# Altium PCB PCB1.PcbDoc
Units mil, origin at the board's own origin, x right, y up, seen from the top; angles counter-clockwise.
Board outline 1040 x 1480 mil, 2 copper layers (Top Layer, Bottom Layer); 33 components, 27 nets, 148 pads, 101 vias.
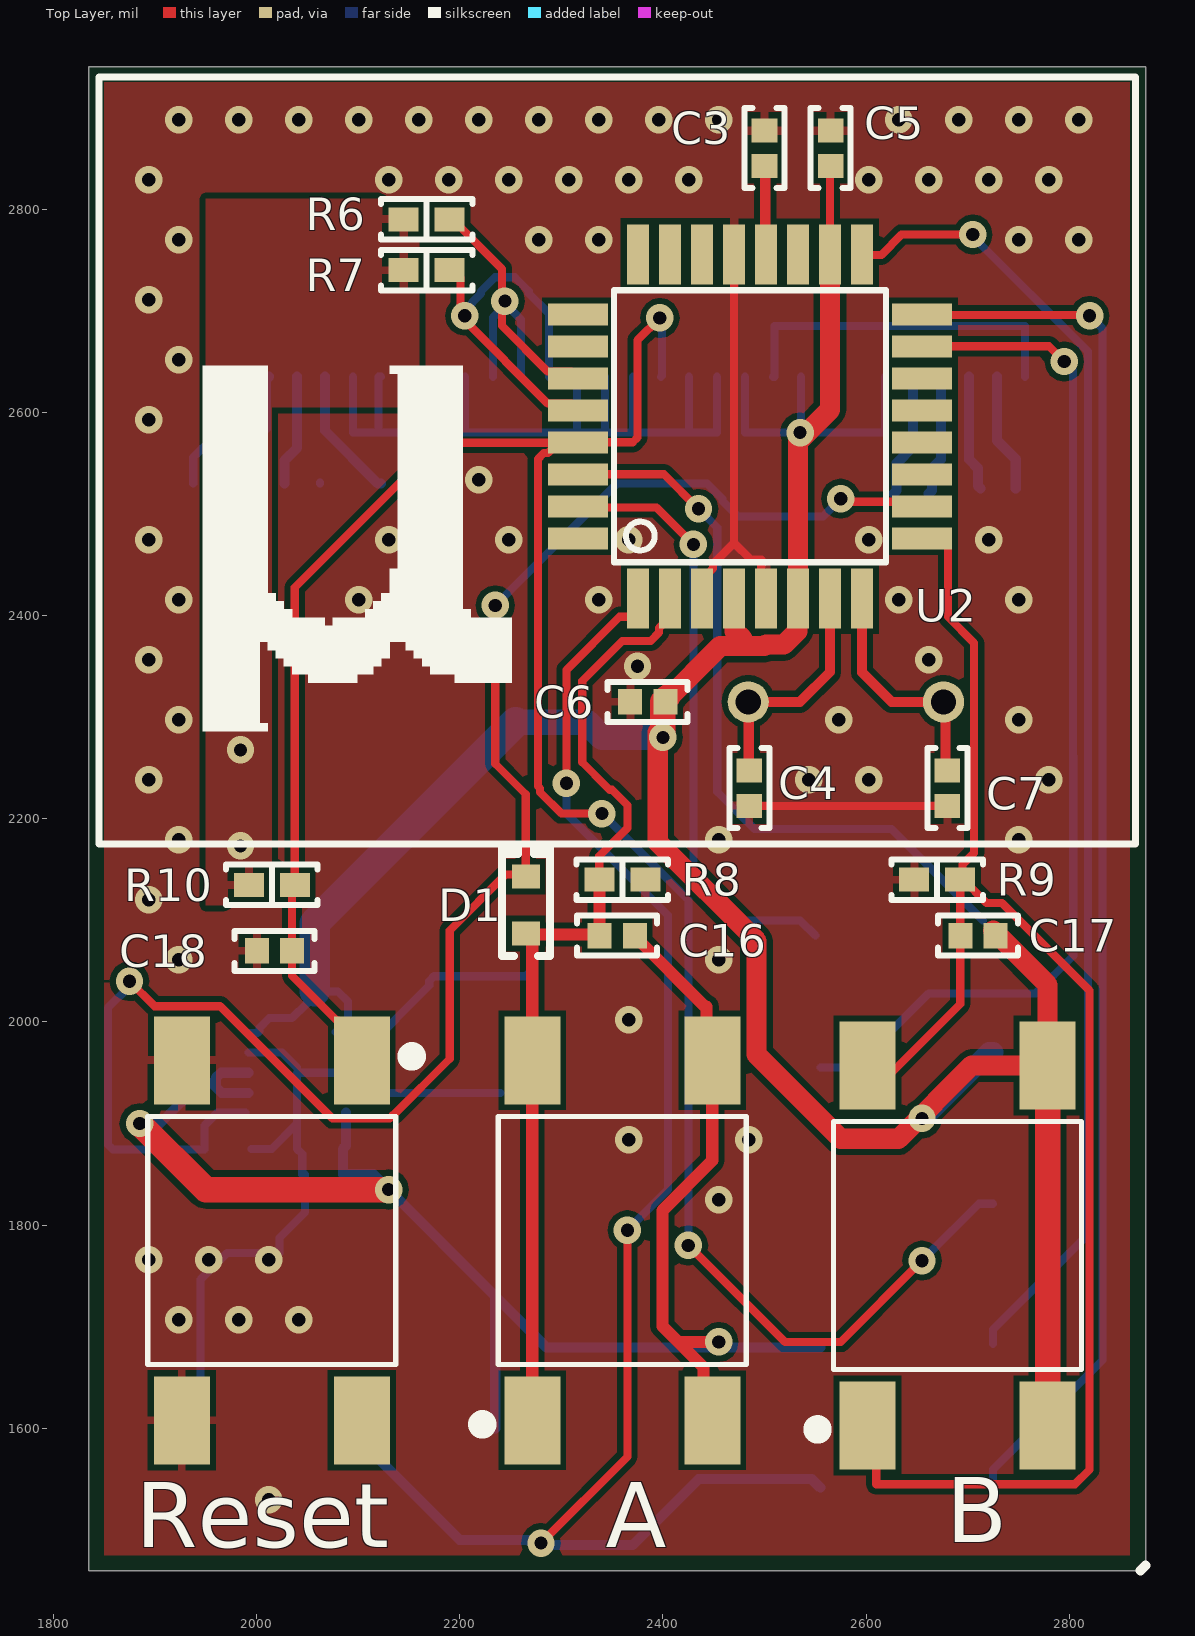
[diagram p0: Top Layer view]
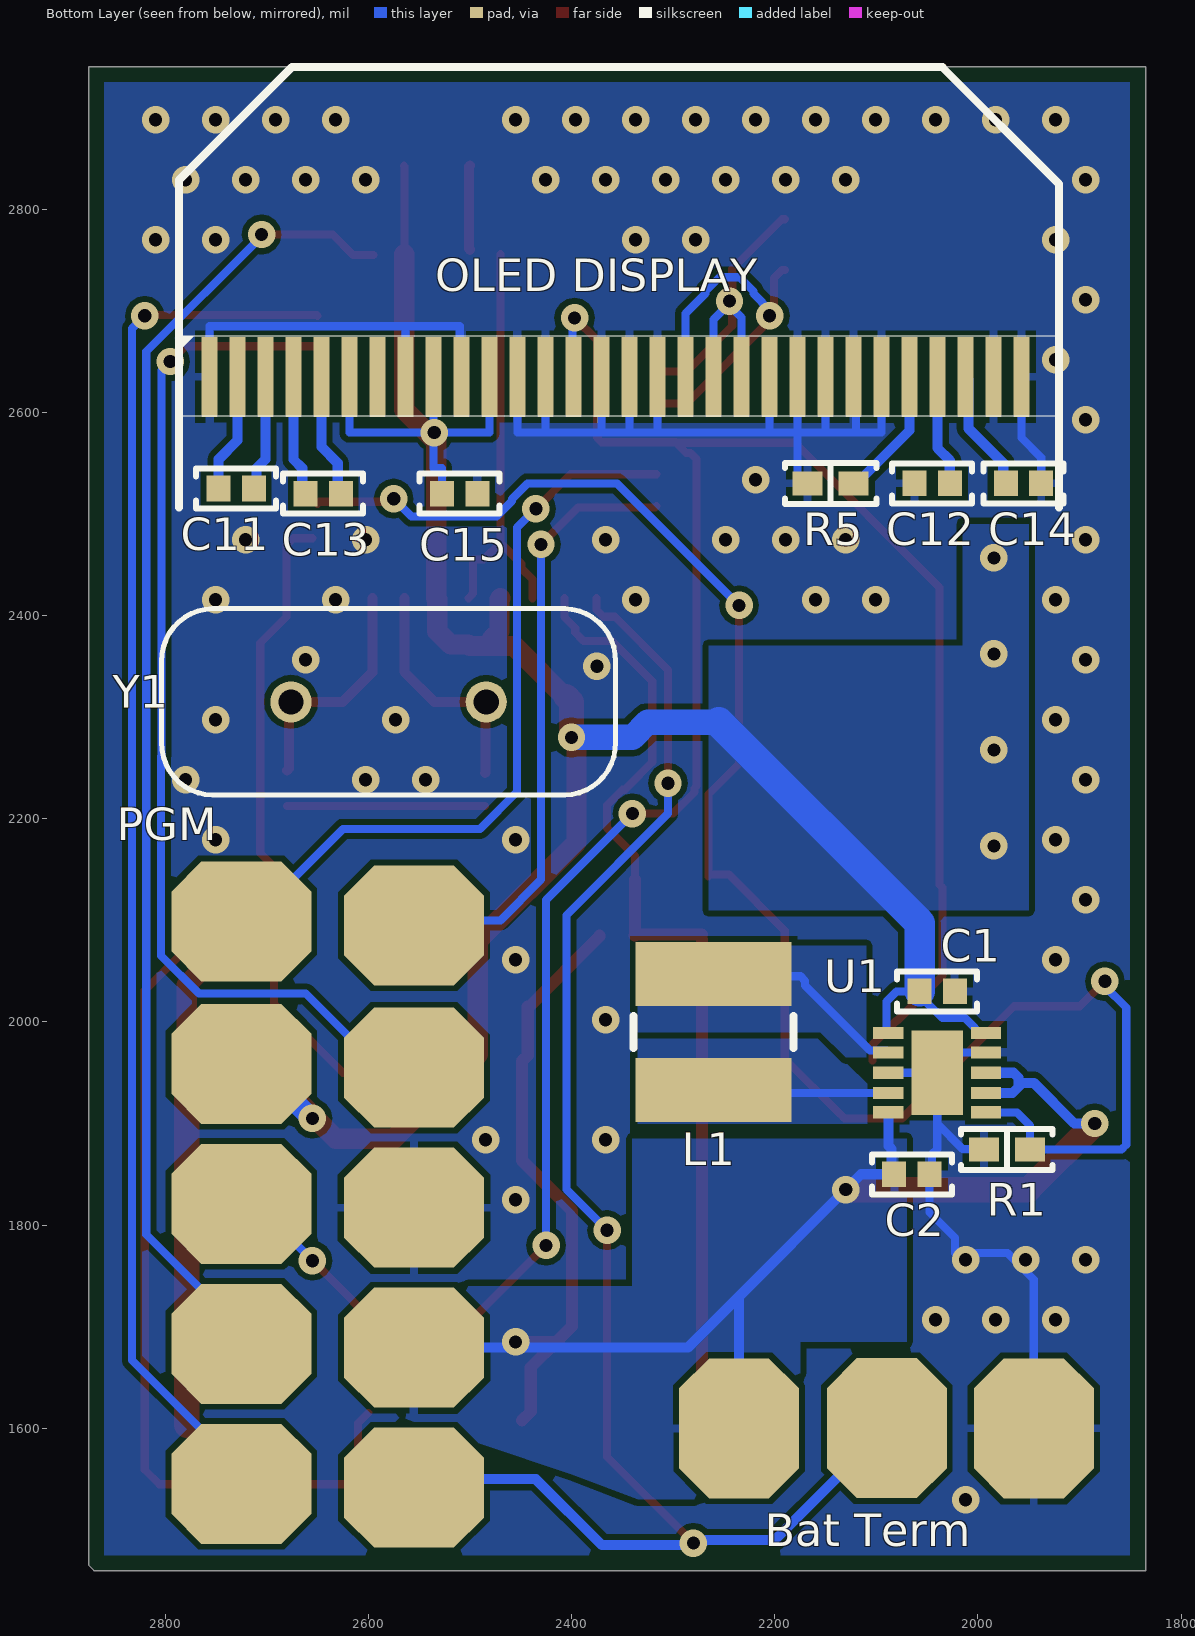
[diagram p1: Bottom Layer view, seen from below]

## Layer stack, top to bottom
Top Solder: solder mask 0.4, Solder Resist, Dk 3.5
Top Layer: signal copper 1.4
Dielectric 1: dielectric 12.6, FR-4, Dk 4.8
Bottom Layer: signal copper 1.4
Bottom Solder: solder mask 0.4, Solder Resist, Dk 3.5

## Board outline
1835,1460 2870,1460 2875,1465 2875,2940 1835,2940

## Design rules (kind name [scope] priority, off if disabled: settings)
BoardOutlineClearance [All] p1: gap=15 ignorepadtopadclearanceinfootprint=FALSE
Clearance [All] p1: gap=6 ignorepadtopadclearanceinfootprint=FALSE except(0: Arc-Hole Track-Hole SMDPad-Hole THPad-Hole Via-Hole Fill-Hole Poly-Hole Region-Hole Text-Hole)
ComponentClearance [All] p1: gap=1 collisioncheckmode=3 verticalgap=1 showdistances=FALSE
DiffPairsRouting [All] p1: maxlimit=393.7 minlimit=6 mostfreqgap=8 toplayer_minwidth=6 toplayer_maxwidth=15 toplayer_prefwidth=8 bottomlayer_minwidth=6 bottomlayer_maxwidth=15 bottomlayer_prefwidth=8 maxuncoupledlength=500
HoleSize [All] p1: absolutevalues=TRUE maxlimit=265 minlimit=13 maxpercent=80.000 minpercent=20.000
HoleToHoleClearance [All] p1: gap=10 allowstackedmicrovias=FALSE
MinimumAnnularRing [All] p1: minimumring=7
MinimumSolderMaskSliver [All] p1: minsoldermaskwidth=0
PlaneClearance [All] p1: clearance=10
PlaneConnect [All] p1: planeconnectstyle=Direct reliefexpansion=16 reliefentries=4 reliefconductorwidth=6 reliefairgap=6
PolygonConnect [All] p1: connectstyle=Relief reliefconductorwidth=8 reliefentries=4 polygonreliefangle="90 Angle" airgapwidth=6
RoutingCorners [All] p1: cornerstyle=45-Degree minsetback=49.21 maxsetback=49.21
RoutingVias [All] p1: holewidth=15 width=30 viastyle="Through Hole" minholewidth=13 minwidth=27 maxholewidth=100 maxwidth=114
SilkToSilkClearance [All] p1: silktosilkclearance=0
SilkToSolderMaskClearance [IsPad] p1: minsilkscreentomaskgap=6 clearancetoexposedcopper=TRUE
SolderMaskExpansion [All] p1: expansion=2.95 istentingtop=FALSE
Width [All] p1: maxlimit=400 minlimit=6 preferedwidth=8
20 further rules are at their usual default settings.

## Classes and differential pairs
component class Sheet2: C3 C4 C5 C6 C7 C11 C12 C13 C14 C15 "OLED DISPLAY" R5 R6 R7 U2 Y1
component class Sheet1: A B "Bat Term" C1 C2 C16 C17 C18 D1 L1 PGM R1 R8 R9 R10 Reset U1

## Components (designator, comment, footprint, x,y, rotation, side; value= is the part's Value field where it differs from the comment)
A "HP0315AFKP4-R" *SW_HP0315AFKP4-R 2360,1785 r90 top (schematic designator But0)
B "HP0315AFKP4-R" *SW_HP0315AFKP4-R 2690,1780 r90 top (schematic designator But1)
"Bat Term" "Batt_Conn" BattConn 2090,1600 r180 bottom (schematic designator Con2)
C1 "10µF" "CAP 0402_1005" 2040,2030 r0 bottom
C2 "10µF" "CAP 0402_1005" 2065,1850 r0 bottom
C3 "0.1µF" "CAP 0402_1005" 2500,2860 r90 top
C4 "22pF" "CAP 0402_1005" 2485,2230 r270 top
C5 "1µF" "CAP 0402_1005" 2565,2860 r270 top
C6 "0.1µF" "CAP 0402_1005" 2385,2315 r180 top
C7 "22pF" "CAP 0402_1005" 2680,2230 r270 top
C11 "1µF" "CAP 0402_1005" 2730,2525 r180 bottom
C12 "4.7µF" "CAP 0402_1005" 2045,2530 r180 bottom
C13 "1µF" "CAP 0402_1005" 2644.35,2520 r0 bottom
C14 "2.2µF" "CAP 0402_1005" 1955,2530 r0 bottom
C15 "10µF" "CAP 0402_1005" 2510,2520 r0 bottom
C16 "10µF" "CAP 0402_1005" 2355,2085 r180 top
C17 "10µF" "CAP 0402_1005" 2710,2085 r180 top
C18 "10µF" "CAP 0402_1005" 2017.68,2070 r0 top
D1 "RB510SM-40T2R" SOD-523 2265,2115 r90 top
L1 "1.5uH" "TDK VLCF4028-2" 2260,1990 r90 bottom value=56µH
"OLED DISPLAY" "SSD1306" PCBComponent_1 2364.22,2631.1 r180 bottom (schematic designator U4)
PGM "Ext_Conn" JtagConn 2639.4,1751.39 r90 bottom (schematic designator Con1)
R1 "10 kOhms" "RES 0402_1005" 1971.47,1874.37 r180 bottom
R5 "910 kOhms" "RES 0402_1005" 2145,2530 r0 bottom
R6 "10 kOhms" "RES 0402_1005" 2167.36,2790 r0 top
R7 "10 kOhms" "RES 0402_1005" 2167.36,2740 r0 top
R8 "10 kOhms" "RES 0402_1005" 2360,2140 r180 top
R9 "10 kOhms" "RES 0402_1005" 2670,2140 r180 top
R10 "10 kOhms" "RES 0402_1005" 2015,2135 r180 top
Reset "HP0315AFKP4-R" *SW_HP0315AFKP4-R 2015,1785 r270 top
U1 "TPS63030DSKT" *SON50P260X260X80-11N 2040,1950 r180 bottom
U2 "ATMEGA328P-AU" QFP80P900X900X120-32N 2485.71,2586.26 r90 top (schematic designator U)
Y1 "8-16MHz" XTAL_ECS-80-18-4XDN 2580,2315 r180 bottom

## Footprints (in the part's own frame and the unit in brackets; to place one, negate y for a bottom-side part, rotate by r counter-clockwise, add the part's x,y. Pads: shape width x height; smd on the part's side, far side on the other; paste and mask are expansions set on the pad)
*SON50P260X260X80-11N [mil]
  rect 30x12 smd mask+1: 1(-48,39) 3(-48,0) 4(-48,-20) 5(-48,-39) 6(48,-39) 7(48,-20) 8(48,0) 9(48,20) 10(48,39)
  rect 30x12 smd paste+0 mask+1: 2(-48,20)
  rect 51x83 smd mask+1: 11(0,0)
*SW_HP0315AFKP4-R [mm]
  rect 2.2x1.4 smd: 1(-4.5,2.25) 2(4.5,2.25) 3(-4.5,-2.25) 4(4.5,-2.25)
  silkscreen extent -4.65,-3.1 3.1,3.55
BattConn [mm]
  oct 3x3.5 smd: 1(-3.683,0) 2(0.008,0.002) 3(3.683,0)
"CAP 0402_1005" [mm] "Chip Capacitor, 2-Leads, Body 1.02x0.51mm, IPC Medium Density"
  rect 0.6x0.64 smd: 1(-0.44,0) 2(0.44,0)
  silkscreen extent -1,-0.5 1,0.5, body extent -0.5,-0.26 0.5,0.26, height 0.52
JtagConn [mm]
  oct 3x3.5 smd: 1(-5.328,-2.144) 2(-1.828,-2.144) 3(1.672,-2.144) 4(5.172,-2.144) 5(-5.231,2.174) 6(-1.731,2.174) 7(1.769,2.174) 8(5.269,2.174) 9(8.728,-2.144) 10(8.825,2.174)
PCBComponent_1 [mm]
  rect 0.4x2 smd: 1(-9.959,0.099) 2(-9.259,0.099) 3(-8.559,0.099) 4(-7.859,0.099) 5(-7.159,0.099) 6(-6.459,0.099) 7(-5.759,0.099) 8(-5.059,0.099) 9(-4.359,0.099) 10(-3.659,0.099) 11(-2.959,0.099) 12(-2.259,0.099) 13(-1.559,0.099) 14(-0.859,0.099) 15(-0.159,0.099) 16(0.541,0.099) 17(1.241,0.099) 18(1.941,0.099) 19(2.641,0.099) 20(3.341,0.099) 21(4.041,0.099) 22(4.741,0.099) 23(5.441,0.099) 24(6.141,0.099) 25(6.841,0.099) 26(7.541,0.099) 27(8.241,0.099) 28(8.941,0.099) 29(9.641,0.099) 30(10.341,0.099)
  silkscreen extent -10.8,-0.89 11.21,1.11
QFP80P900X900X120-32N [mm]
  rect 1.5x0.55 smd: 1(-4.3,2.8) 2(-4.3,2) 3(-4.3,1.2) 4(-4.3,0.4) 5(-4.3,-0.4) 6(-4.3,-1.2) 7(-4.3,-2) 8(-4.3,-2.8) 17(4.3,-2.8) 18(4.3,-2) 19(4.3,-1.2) 20(4.3,-0.4) 21(4.3,0.4) 22(4.3,1.2) 23(4.3,2) 24(4.3,2.8)
  rect 0.55x1.5 smd: 9(-2.8,-4.3) 10(-2,-4.3) 11(-1.2,-4.3) 12(-0.4,-4.3) 13(0.4,-4.3) 14(1.2,-4.3) 15(2,-4.3) 16(2.8,-4.3) 25(2.8,4.3) 26(2,4.3) 27(1.2,4.3) 28(0.4,4.3) 29(-0.4,4.3) 30(-1.2,4.3) 31(-2,4.3) 32(-2.8,4.3)
  silkscreen extent -3.4,-3.4 3.4,3.4, body extent -4.63,-4.5 4.37,4.5, height 1.16
"RES 0402_1005" [mm] "Chip Resistor, 2-Leads, Body 1.0x0.5mm, IPC Medium Density"
  rect 0.75x0.6 smd: 1(-0.575,0) 2(0.575,0)
  silkscreen extent -1.14,-0.51 1.14,0.51, body extent -0.5,-0.25 0.5,0.25, height 0.35
SOD-523 [mm] "Molded Diode, 2-Leads, Body 1.60x0.80mm, IPC Medium Density"
  rect 0.6x0.7 smd: 1(-0.71,0) 2(0.71,0)
  silkscreen extent -1.27,-0.6 1.47,0.6, body extent -0.8,-0.4 0.8,0.4, height 0.82
"TDK VLCF4028-2" [mm] "Precision Wire Wound Inductor, 2-Leads, Body 4.00x4.00mm, IPC Medium Density"
  rect 1.6x3.9 smd: 1(-1.45,0) 2(1.45,0)
  silkscreen extent -0.4,-2 0.4,2, body extent -2.05,-2 2.05,2, height 2.81
XTAL_ECS-80-18-4XDN [mm]
  round 1.03 hole 0.63: 1(-2.44,0) 2(2.44,0)
  silkscreen extent -5.68,-2.33 5.68,2.33, body extent -5.67,-2.32 5.68,2.33, height 3.7

## Part data
A B Reset: "Tactile Switch SPST-NO Top Actuated Surface Mount", Package=None, Availability=Unavailable, MF="NKK Switches", MP=HP0315AFKP4-R, Price=None, SnapEDA_Link=https://www.snapeda.com/parts/HP0315AFKP4-R/NKK%20Switches/view-part/379626/?ref=snap
C1 C2 C15 C16 C17 C18: library part CL05A106MP8NUB8, "CAP CER 10UF 10V X5R 0402", Device Package="0402 (1005 Metric)", Manufacturer="Samsung Electro-Mechanics", Operating Temperature="-55°C ~ 85°C", Supplier Part Number 1=1276-6830-1-ND, Temperature Coefficient=X5R, Tolerance=±20%, Voltage - Rated=10V, Applications="General Purpose", Capacitance=10µF, ComponentLink1Description=Datasheet, ComponentLink1URL=http://www.samsungsem.com/kr/support/product-search/mlcc/CL05A106MP8NUB8.jsp, ComponentLink2Description="DigiKey Link", ComponentLink2URL=http://digikey.com/product-detail/en/samsung-electro-mechanics/CL05A106MP8NUB8/1276-6830-1-ND/5961689, LastUpdated="19.01.2020 16:07:13", Lifecycle Status=Active, Minimum Order=1, Mounting Type="Surface Mount, MLCC", Package / Case="0402 (1005 Metric)", Packaging=TapeAndReel, Part Number=CL05A106MP8NUB8, Part Status=Active, PartId=1758, Price=0.08, Series=CL, Size / Dimension="0.039\" L x 0.020\" W (1.00mm x 0.50mm)", Supplier 1=DigiKey, Thickness (Max)="0.035\" (0.90mm)"
C3 C4 C5 C6 C7 C11 C12 C13 C14: library part CL05A106MP8NUB8, "CAP CER 10UF 10V X5R 0402", Capacitance=10µF, Device Package="0402 (1005 Metric)", Manufacturer="Samsung Electro-Mechanics", Operating Temperature="-55°C ~ 85°C", Supplier Part Number 1=1276-6830-1-ND, Temperature Coefficient=X5R, Tolerance=±20%, Voltage - Rated=10V, Applications="General Purpose", ComponentLink1Description=Datasheet, ComponentLink1URL=http://www.samsungsem.com/kr/support/product-search/mlcc/CL05A106MP8NUB8.jsp, ComponentLink2Description="DigiKey Link", ComponentLink2URL=http://digikey.com/product-detail/en/samsung-electro-mechanics/CL05A106MP8NUB8/1276-6830-1-ND/5961689, LastUpdated="19.01.2020 16:07:13", Lifecycle Status=Active, Minimum Order=1, Mounting Type="Surface Mount, MLCC", Package / Case="0402 (1005 Metric)", Packaging=TapeAndReel, Part Number=CL05A106MP8NUB8, Part Status=Active, PartId=1758, Price=0.08, Series=CL, Size / Dimension="0.039\" L x 0.020\" W (1.00mm x 0.50mm)", Supplier 1=DigiKey, Thickness (Max)="0.035\" (0.90mm)"
D1: "RB510SM-40 IS LOW VF", Current - Average Rectified (Io)=100mA, Current - Reverse Leakage @ Vr="2µA @ 40V", Device Package="SC-79, SOD-523", Manufacturer="Rohm Semiconductor", Operating Temperature - Junction="150°C (Max)", Supplier Device Package=EMD2, Supplier Part Number 1=846-RB510SM-40T2RCT-ND, Voltage - DC Reverse (Vr) (Max)=40V, Voltage - Forward (Vf) (Max) @ If="480mV @ 10mA", ComponentLink1Description=Datasheet, ComponentLink1URL=https://www.rohm.com/datasheet/RB510SM-40/rb510sm-40t2r-e, ComponentLink2Description="DigiKey Link", ComponentLink2URL=http://digikey.com/product-detail/en/rohm-semiconductor/RB510SM-40T2R/846-RB510SM-40T2RCT-ND/10670875, Diode Type=Schottky, LastUpdated="19.01.2020 16:25:52", Lifecycle Status=Active, Minimum Order=1, Mounting Type="Surface Mount", Package / Case="SC-79, SOD-523", Packaging=Unknown, Part Number=RB510SM-40T2R, Part Status=Active, PartId=2868, Price=0.03, Series=-, Speed="Small Signal =< 200mA (Io), Any Speed", Supplier 1=DigiKey
L1: library part VLCF5028T-560MR43-2, "FIXED IND 56UH 430MA 410 MOHM", Current - Saturation=430mA, DC Resistance (DCR)="410mOhm Max", Device Package=Nonstandard, Manufacturer="TDK Corporation", Operating Temperature="-40°C ~ 105°C", Supplier Part Number 1=445-6567-1-ND, Tolerance=±20%, Inductance=56µH, Inductance Frequency - Test=100kHz, ComponentLink1Description=Datasheet, ComponentLink1URL=https://product.tdk.com/info/en/catalog/datasheets/inductor_commercial_power_vlcf5028-2_en.pdf?ref_disty=digikey, ComponentLink2Description="DigiKey Link", ComponentLink2URL=http://digikey.com/product-detail/en/tdk-corporation/VLCF5028T-560MR43-2/445-6567-1-ND/2465874, Current Rating (Amps)=430mA, Height - Seated (Max)="0.110\" (2.80mm)", LastUpdated="19.01.2020 16:24:51", Lifecycle Status=Active, Material - Core=Ferrite, Minimum Order=1, Mounting Type="Surface Mount", Package / Case=Nonstandard, Packaging=TapeAndReel, Part Number=VLCF5028T-560MR43-2, Part Status=Active, PartId=193, Price=0.63, Series=VLCF, Shielding=Shielded, Size / Dimension="0.197\" L x 0.197\" W (5.00mm x 5.00mm)", Supplier 1=DigiKey, Type=Wirewound
R1 R6 R7 R8 R9 R10: library part RP73PF1E10KBTD, "RES 10K OHM 0.1% 1/10W 0402", Device Package="0402 (1005 Metric)", Manufacturer="TE Connectivity Passive Product", Operating Temperature="-55°C ~ 155°C", Power (Watts)="0.1W, 1/10W", Supplier Device Package=0402, Supplier Part Number 1=A127415CT-ND, Temperature Coefficient=±25ppm/°C, Tolerance=±0.1%, ComponentLink1Description=Datasheet, ComponentLink1URL=https://www.te.com/commerce/DocumentDelivery/DDEController?Action=srchrtrv&DocNm=1773272&DocType=DS&DocLang=English, ComponentLink2Description="DigiKey Link", ComponentLink2URL=http://digikey.com/product-detail/en/te-connectivity-passive-product/RP73PF1E10KBTD/A127415CT-ND/8261381, Composition="Thin Film", Height - Seated (Max)="0.014\" (0.35mm)", LastUpdated="19.01.2020 16:11:48", Lifecycle Status=Active, Minimum Order=1, Number of Terminations=2, Package / Case="0402 (1005 Metric)", Packaging=TapeAndReel, Part Number=RP73PF1E10KBTD, Part Status=Active, PartId=2434, Price=0.08, Resistance="10 kOhms", Series="RP73P, Holsworthy", Size / Dimension="0.039\" L x 0.020\" W (1.00mm x 0.50mm)", Supplier 1=DigiKey
R5: library part RP73PF1E10KBTD, "RES 10K OHM 0.1% 1/10W 0402", Device Package="0402 (1005 Metric)", Manufacturer="TE Connectivity Passive Product", Operating Temperature="-55°C ~ 155°C", Power (Watts)="0.1W, 1/10W", Resistance="10 kOhms", Supplier Device Package=0402, Supplier Part Number 1=A127415CT-ND, Temperature Coefficient=±25ppm/°C, Tolerance=±0.1%, ComponentLink1Description=Datasheet, ComponentLink1URL=https://www.te.com/commerce/DocumentDelivery/DDEController?Action=srchrtrv&DocNm=1773272&DocType=DS&DocLang=English, ComponentLink2Description="DigiKey Link", ComponentLink2URL=http://digikey.com/product-detail/en/te-connectivity-passive-product/RP73PF1E10KBTD/A127415CT-ND/8261381, Composition="Thin Film", Height - Seated (Max)="0.014\" (0.35mm)", LastUpdated="19.01.2020 16:11:48", Lifecycle Status=Active, Minimum Order=1, Number of Terminations=2, Package / Case="0402 (1005 Metric)", Packaging=TapeAndReel, Part Number=RP73PF1E10KBTD, Part Status=Active, PartId=2434, Price=0.08, Series="RP73P, Holsworthy", Size / Dimension="0.039\" L x 0.020\" W (1.00mm x 0.50mm)", Supplier 1=DigiKey
U1: "Buck-Boost Switching Regulator IC Positive Adjustable 1.2V 1 Output 900mA _Switch_ 10-WFDFN Exposed Pad", Package="SON-10 Texas Instruments", Availability=Unavailable, MF="Texas Instruments", MP=TPS63030DSKT, Price=None, SnapEDA_Link=https://www.snapeda.com/parts/TPS63030DSKT/Texas%20Instruments/view-part/449700/?ref=snap
U2: "AVR AVRÂ® ATmega Microcontroller IC 8-Bit 20MHz 32KB _16K x 16_ FLASH 32-TQFP _7x7_", Package="TQFP-32 Microchip Technology", Availability=Unavailable, MF="Microchip Technology", MP=ATMEGA328P-AU, Price=None, SnapEDA_Link=https://www.snapeda.com/parts/ATMEGA328P-AU/Microchip/view-part/4593405/?ref=snap
Y1: library part ECS-80-18-4XDN, "8MHz Â±30ppm Crystal 18pF 80 Ohms HC-49/US", Package="HC-49/US ECS International", Digi-Key_Part_Number=X1115-ND, Digi-Key_Purchase_URL=https://www.digikey.in/product-detail/en/ecs-inc/ECS-80-18-4XDN/X1115-ND/827606?utm_source=snapeda&utm_medium=aggregator&utm_campaign=symbol, MF="ECS Inc.", MP=ECS-80-18-4XDN, SnapEDA_Link=https://www.snapeda.com/parts/ECS-80-18-4XDN/ECS%20Inc./view-part/49558/?ref=snap

## Via types
v1: diameter 27, hole 13, Top Layer to Bottom Layer, tented both sides, 101 vias

## Nets (pads, with @x,y where several pads share a name; then routed paths per layer and width w, separated by ;. In a path a pad name is that pad's centre, name@x,y a point inside that pad or via, vN(x,y) a via of type N, cw(c..) or ccw(c..) an arc to the next point about the centre after c; other vN are vias at no path point)
3.3V: "OLED DISPLAY.6" "OLED DISPLAY.9" "OLED DISPLAY.11" B.3 B.4 C1.2 C5.2 C6.1 C15.2 C17.1 PGM.8 R6.1 R7.1 R10.2 U1.1 U1.10 U2.4 U2.6 U2.18 | length 3075.7
  Top Layer w8: 2465,2370 2472.44,2377.44 2478,2377.44 ; U2.18@2564.45,2760.55 2564.45,2842.13 C5.2
  Top Layer w20: v1@2395,2285 2395,2176.84 2492.14,2079.7 2492.14,1967.86 2575,1885 2631.93,1885 2704.09,1957.17 B.4 2778.58,2036.42 C17.1@2725,2090 ; C6.1 2402.32,2315.79 2456.53,2370 2465,2370 2500.02,2370 2501.46,2371.44 2518.91,2371.44 2532.13,2384.66 2532.13,2416.14 U2.6 2532.95,2570.93 2564.45,2602.42 U2.18 ; U2.4 2470.79,2416.14 2470.79,2384.66 2478,2377.44
  Top Layer w25: v1(2400,2280) 2400,2315 C6.1@2405,2320 ; B.3 B.4
  Bottom Layer w8: U1.10 2001,1989 2003,1991 2003,1994.14 2012.56,2003.7 2034.93,2003.7 2049.51,2018.28 2049.51,2021.4 2057.32,2029.21 C1.2 2080,2030 2090,2020 2090,1990 U1.1@2078,1990 ; 2480.71,2635 2480.71,2580 v1@2535.83,2580 ; C15.2 2527.32,2545 2535.83,2545 v1@2535.83,2580 ; 2535.83,2635 v1@2535.83,2580 ; 2618.5,2635 2618.5,2580 v1@2535.83,2580
  Bottom Layer w20: v1(2655,1905) 2656.08,1905 2721.08,1970 PGM.8@2725,1970
  Bottom Layer w25: 2255,2295 2325,2295 2340,2280 v1(2400,2280)
  Bottom Layer w30: C1.2 2057.32,2097.32 2255,2295
  other v1: 1984.25,2173.23 1984.25,2267.72 1984.25,2362.2 1984.25,2456.69 2535,2580
Button0: A.1 A.2 C16.2 D1.1 R8.2 U2.2 | length 950.3
  Top Layer w8: R8.2@2337.36,2145 2337.36,2163.26 2365,2190.9 2365,2213.23 2349.73,2228.5 2347.61,2228.5 2343.78,2232.33 2320.56,2255.56 2320.56,2335.56 2360,2375 2388,2375 2396.3,2383.3 2396.3,2387.6 2406.97,2398.27 U2.2
  Top Layer w12: A.1 A.2 D1.1@2271.42,2081.24 ; D1.1@2271.42,2086.02 2336.65,2086.02 C16.2@2337.52,2085.16 ; R8.2 2337.52,2139.84 C16.2@2337.52,2085.16 ; C16.2 C16.2@2337.52,2085.16
Button1: B.1 B.2 C17.2 R9.1 U2.9 | length 1521.4
  Top Layer w8: B.1@2600,1615 2610,1605 2610,1545 2805.76,1545 2820,1559.24 2820,2030.87 2733.91,2116.96 2718.63,2116.96 2695.59,2140 R9.1 2692.68,2139.96 C17.2 2692.68,2017.68 B.2@2625,1950 ; U2.9 2673.7,2476.02 2680.53,2469.2 2680.53,2398.73 2706.34,2372.92 2706.34,2166.34 2695,2155 2695,2147.81 R9.1@2692.19,2145
GND: "Bat Term.3" "OLED DISPLAY.1" "OLED DISPLAY.8" "OLED DISPLAY.10" "OLED DISPLAY.12" "OLED DISPLAY.13" "OLED DISPLAY.15" "OLED DISPLAY.16" "OLED DISPLAY.17" "OLED DISPLAY.21" "OLED DISPLAY.22" "OLED DISPLAY.23" "OLED DISPLAY.24" "OLED DISPLAY.25" "OLED DISPLAY.29" "OLED DISPLAY.30" C1.1 C2.1 C3.2 C4.2 C5.1 C6.2 C7.2 C12.1 C14.1 C15.1 C18.1 PGM.3 R1.1 R5.2 R8.1 R9.2 Reset.3 Reset.4 U1.3 U1.9 U1.11 U2.3 U2.5 U2.21 | length 2680.8
  Top Layer w8: U2.3 2438.46,2435.67 2449.13,2446.34 2449.13,2450.64 2469.96,2471.46 ; U2.21 2469.96,2471.46 ; C4.2 C7.2 ; U2.5 2496.77,2421.65 2496.77,2455 2486.42,2455 2469.96,2471.46
  Bottom Layer w8: C14.1 1937.68,2555.5 1957.09,2574.91 1957.09,2635 ; 1945,1600 1945,1746.53 1970.87,1772.4 2022.6,1772.4 2022.6,1787.6 2047.68,1812.68 C2.1 ; U1.9 2025,1970 U1.11@2040,1955 ; R1.1@1995,1875 2015,1875 2040,1900 ; C2.1@2045,1850 2045,1870 2040,1875 2040,1900 ; C12.1 C12.1@2062.32,2530.79 ; U1.3 U1.11 2040,1900 ; 2095,2634.88 2094.88,2635 2094.88,2580 2120,2580 ; 2122.44,2635 2120,2635 2120,2580 ; 2150,2635 2150,2580 ; R5.2 2169.75,2530 2177.56,2537.81 2177.56,2580 ; 2177.56,2635 2177.56,2580 ; 2205.12,2635 2205.12,2580 ; 2315.35,2635 2315.35,2580 ; 2342.91,2635 2342.91,2580 ; 2370.47,2635 2370.47,2580 ; 2425.59,2635 2425.59,2580 ; 2453.15,2635 2453.15,2580 2425.59,2580 ; 2508.27,2635 2510,2635 2510,2685 2563.39,2685 ; 2563.39,2635 2563.39,2685 ; 2756.3,2635 2756.3,2685 2563.39,2685 ; 2120,2580 2150,2580 ; 2150,2580 2177.56,2580 ; 2177.56,2580 2205.12,2580 ; 2205.12,2580 2315.35,2580 ; 2315.35,2580 2342.91,2580 ; 2342.91,2580 2370.47,2580 ; 2370.47,2580 2425.59,2580
  other v1: 2012.09,1529.72 1923.5,1706.89 1982.56,1706.89 2041.61,1706.89 1893.98,1765.94 1953.03,1765.94 2012.09,1765.94 2455,1825 2366.42,1884.06 2484.53,1884.06 2366.42,2002.17 1923.5,2061.22 2455,2061.22 1893.98,2120.28 1923.5,2179.33 2455,2179.33 2750.28,2179.33 1893.98,2238.39 2543.58,2238.39 2602.64,2238.39 2779.8,2238.39 1923.5,2297.44 2573.11,2297.44 2750.28,2297.44 2375,2350 1893.98,2356.5 2661.69,2356.5 1923.5,2415.55 2100.67,2415.55 2159.72,2415.55 2336.89,2415.55 2632.17,2415.55 2750.28,2415.55 1893.98,2474.61 2130.2,2474.61 2189.25,2474.61 2248.31,2474.61 2366.42,2474.61 2602.64,2474.61 2720.75,2474.61 2218.78,2533.66 1893.98,2592.72 1923.5,2651.77 1893.98,2710.83 1923.5,2769.88 2277.83,2769.88 2336.89,2769.88 2750.28,2769.88 2809.33,2769.88 1893.98,2828.94 2130.2,2828.94 2189.25,2828.94 2248.31,2828.94 2307.36,2828.94 2366.42,2828.94 2425.47,2828.94 2602.64,2828.94 2661.69,2828.94 2720.75,2828.94 2779.8,2828.94 1923.5,2887.99 1982.56,2887.99 2041.61,2887.99 2100.67,2887.99 2159.72,2887.99 2218.78,2887.99 2277.83,2887.99 2336.89,2887.99 2395.94,2887.99 2455,2887.99 2632.17,2887.99 2691.22,2887.99 2750.28,2887.99 2809.33,2887.99
HDQ: "Bat Term.2" PGM.1 U2.1 | length 1602
  Top Layer w8: v1(2280,1487) 2365,1572 v1(2365,1795) ; v1(2305,2235) 2305,2346.5 2357.33,2398.83 2368.65,2398.83 2375.47,2405.65 U2.1
  Bottom Layer w8: v1(2305,2235) 2305,2205 2405,2105 2405,1835 v1(2365,1795)
  Bottom Layer w10: 2090,1600 2200,1490 2267.14,1490 2267.46,1489.68 2277.32,1489.68 2282,1485 2370,1485 2435,1550 2546.61,1550 PGM.1
MISO: PGM.5 U2.16 | length 1369.9
  Top Layer w8: U2.16@2650,2695 2650.75,2695.75 2819.25,2695.75 v1(2820,2695)
  Bottom Layer w8: PGM.5 2725,1559.46 2832.5,1666.96 2832.5,2682.5 v1(2820,2695)
MOSI: PGM.4 U2.15 | length 1034.6
  Top Layer w8: U2.15 2780,2665 v1(2795,2650)
  Bottom Layer w8: PGM.4 2588.71,1955 2661.59,2027.87 2766.62,2027.87 2803.9,2065.15 2803.9,2261.1 2803.57,2261.43 2803.57,2641.43 v1(2795,2650) 2795,2655 v1@2794.79,2655.21
NetC3_1: C3.1 U2.20 | length 83.3
  Top Layer w10: U2.20@2500,2760 2500.73,2760.73 2500.73,2841.95 C3.1
NetC4_1: C4.1 U2.7 Y1.2 | length 234.6
  Top Layer w10: Y1.2 2484.47,2314.47 2484.47,2245.53 C4.1@2485,2245 ; Y1.2@2485,2315 2535,2315 2564.45,2344.45 U2.7
NetC7_1: C7.1 U2.8 Y1.1 | length 234.4
  Top Layer w10: U2.8 2595.94,2344.06 2625,2315 Y1.1 2678.03,2313.03 2678.03,2249.29 C7.1
NetC11_1: "OLED DISPLAY.2" C11.1 | length 117.7
  Bottom Layer w10: 2728.74,2635 2728.74,2572.5 2747.32,2553.92 C11.1
NetC11_2: "OLED DISPLAY.3" C11.2 | length 114.8
  Bottom Layer w10: 2701.18,2635 2701.18,2553.82 2710,2545 2710,2527.68 C11.2
NetC12_2: "OLED DISPLAY.27" C12.2 | length 110
  Bottom Layer w10: C12.2 2027.68,2552.68 2039.76,2564.76 2039.76,2635
NetC13_1: "OLED DISPLAY.5" C13.1 | length 122.9
  Bottom Layer w10: C13.1 2630,2522.98 2630,2550 2646.06,2566.06 2646.06,2635
NetC13_2: "OLED DISPLAY.4" C13.2 | length 120
  Bottom Layer w10: C13.2 2665,2523.33 2665,2545 2673.62,2553.62 2673.62,2635
NetC14_2: "OLED DISPLAY.28" C14.2 | length 121.5
  Bottom Layer w10: C14.2 1975,2532.68 1975,2550 2009.33,2584.33 2009.33,2632.13 2012.21,2635
NetL1_1: L1.1 U1.4 | length 152
  Bottom Layer w8: U1.4 L1.1@2240,1930
NetL1_2: L1.2 U1.2 | length 217.7
  Bottom Layer w8: U1.2 2090,1972 2106.14,1972 2170,2035.86 2170,2040.31 2174.69,2045 2265,2045 L1.2@2270,2050
NetR5_1: "OLED DISPLAY.26" R5.1 | length 129.5
  Bottom Layer w10: 2067.32,2635 2067.32,2582.09 2119.41,2530 R5.1
OLED_RS: "OLED DISPLAY.14" C18.2 PGM.7 R10.1 Reset.1 U2.29 | length 2359.5
  Top Layer w8: Reset.1 2103.58,1977.91 2080.02,2001.47 2078.93,2001.47 2035,2045.4 C18.2 2035,2132.36 R10.1 2037.64,2427.64 2180,2570 U2.29@2297.21,2570 ; v1(2340,2205) 2300,2205 2279,2226 2279,2229.89 2276.89,2232 2276.89,2553.98 2282.75,2559.84 2287.05,2559.84 U2.29@2297.21,2570 ; v1(2396.95,2692.93) 2375,2670.98 2375,2575.2 2370.31,2570.51 U2.29 2297.72,2570.51 U2.29@2297.21,2570 ; v1(2425,1780) 2520,1685 2575,1685 v1(2655,1765)
  Bottom Layer w8: v1(2340,2205) 2425,2120 v1(2425,1780) ; v1(2396.95,2692.93) 2399.02,2690.87 2399.02,2635.98 2398.03,2635 ; v1@2660,1765 2660,1770 2711.02,1821.02 PGM.7
REG_EN: D1.2 R1.2 U1.6 U2.10 | length 1723.4
  Top Layer w8: v1(1875,2040) 1899.53,2015.47 1964.19,2015.47 2074.66,1905 2131.14,1905 2135,1908.86 2135.28,1908.86 2190.14,1963.72 2190.14,2090.14 2245,2145 D1.2@2265,2145 ; v1(2235,2410) 2235,2254.09 2265,2224.09 D1.2@2265,2145 ; D1.2 D1.2@2265,2145 ; v1(2575,2515) 2578.06,2511.94 2648.06,2511.94 U2.10@2650,2510
  Bottom Layer w8: v1(1875,2040) 1875,2035 1854,2014 1854,1879.05 1858.69,1874.37 R1.2 1948.83,1898.18 1961.65,1911 U1.6@1989,1911 ; v1(2235,2410) 2355,2530 2443.23,2530 2458.5,2514.73 2458.5,2512.61 2473.71,2497.4 2557.4,2497.4 v1(2575,2515)
RxD: PGM.9 U2.31 | length 601.9
  Top Layer w8: U2.31 2317.68,2506.26 2393.74,2506.26 v1(2430,2470)
  Bottom Layer w8: v1(2430,2470) 2430,2140 2470,2100 2535,2100 PGM.9@2550,2085
SCK: PGM.6 U2.17 | length 1295.8
  Top Layer w8: U2.17@2595,2755 2615,2755 2635,2775 v1(2705,2775)
  Bottom Layer w8: v1(2705,2775) 2705,2773.23 2818.5,2659.73 2818.5,1790.76 2725,1697.26 PGM.6
SCL: "OLED DISPLAY.18" R7.2 U2.28 | length 384.1
  Top Layer w8: R7.2 2192.95,2740 2200.76,2732.19 v1@2200.76,2695 ; v1@2202.71,2692.71 2286.59,2608.83 2309.59,2608.83 U2.28
  Bottom Layer w8: v1(2205,2695) 2205,2700.14 2211.97,2707.12 2211.97,2708.09 2220.95,2717.07 2220.95,2719.19 2234.72,2732.95 2254.19,2732.95 2267.95,2719.19 2267.95,2717.07 2287.8,2697.23 2287.8,2635
SDA: "OLED DISPLAY.19" "OLED DISPLAY.20" R6.2 U2.27 | length 380.7
  Top Layer w8: R6.2 2192.95,2790 2241.76,2741.2 2241.76,2712.15 v1(2244.45,2709.45) ; v1@2241.76,2709.45 2241.76,2685.17 2286.59,2640.33 2309.59,2640.33 U2.27
  Bottom Layer w8: 2232.68,2635 2232.68,2693.35 2244.45,2705.12 2244.45,2707.08 2260.24,2691.3 2260.24,2635
TxD: PGM.10 U2.30 | length 732.7
  Top Layer w8: U2.30 2400.98,2539.02 v1(2435,2505)
  Bottom Layer w8: v1(2435,2505) 2453.5,2486.5 2453.5,2226.5 2490,2190 2625,2190 PGM.10@2715,2100
VBatt: "Bat Term.1" A.3 A.4 C2.2 C16.1 PGM.2 U1.5 U1.7 U1.8 | length 1766
  Top Layer w12: C16.1 2372.32,2084.21 2441.53,2015 2442.97,2015 2442.97,1967.03 2448.58,1961.42 2448.58,1863.58 2399.5,1814.5 2399.5,1700.5 2415,1685 ; A.3 2440,1616.42 2440,1660 2415,1685 ; v1(2455,1685) 2415,1685
  Top Layer w25: v1(1885,1900) 1950,1835 v1(2130,1835)
  Bottom Layer w10: v1(1885,1900) 1905,1900 1945,1940 1955.86,1940 1960,1935.86 ; U1.7 1965.86,1930 1960,1935.86 ; U1.8 1965,1950 1960,1945 1960,1935.86 ; U1.5 2088,1878 2085,1875 2085,1850 2115,1850 v1(2130,1835) 2235,1730 ; 2235,1600 2235,1730 ; PGM.2 2285.59,1679.41 2235,1730
pads on no net: "OLED DISPLAY.7" Reset.2 U2.11 U2.12 U2.13 U2.14 U2.19 U2.22 U2.23 U2.24 U2.25 U2.26 U2.32

## Polygon pours and split planes (outlines as drawn)
GND on Bottom Layer "GND_L02_P018" (solid, pour order 18): 1835,2940 2875,2940 2875,1460 1835,1460
GND on Bottom Layer "GND_L02_P001" (solid, pour order 1): 2060,1900 2060,1690 2015,1645 2015,1520 1915,1520 1875,1560 1875,1850 1930,1850 1980,1900
VBatt on Bottom Layer "VBATT_L02_P000" (solid, pour order 0): 2070,1885 2340,1885 2340,1740 2595,1740 2595,1620 2400,1555 2335,1530 2175,1530 2175,1685 2070,1685 2070,1875
3.3V on Bottom Layer "3.3V_L02_P008" (solid, pour order 8): 2265,2370 2265,2110 1950,2110 1950,2490 2015,2490 2015,2370
NetL1_1 on Bottom Layer "NETL1_1_L02_P004" (solid, pour order 4): 2105,1900 2335,1900 2335,1985 2155,1985 2105,1935
NetL1_2 on Bottom Layer "NETL1_2_L02_P002" (solid, pour order 2): 2335,2075 2110,2075 2110,1980 2110,1965 2130,1965 2155,1990 2335,1990
GND on Top Layer "GND_L01_P017" (solid, pour order 17): 1835,2940 2875,2940 2875,1460 1835,1460
3.3V on Top Layer "3.3V_L01_P007" (solid, pour order 7): 2160,2810 1950,2810 1950,2115 2015,2115 2015,2605 2160,2605

## Silkscreen, mask and mechanical layers (free items; w line width, h text height)
Top Overlay:
  drawing of 6 lines, arcs and shapes, not listed
Bottom Overlay:
  lines w7.87: 1920.17,2506.1 1920.17,2824.83 2035,2939.66 2674.66,2939.66 ; 2675,2940 2786.31,2828.69 2786.31,2506.1